# Altium PCB bbr18_motor_battery_board.PcbDoc
Units mm, origin at the board's own origin, x right, y up, seen from the top; angles counter-clockwise.
Board outline 57.41 x 45.19 mm, 2 copper layers (Top Layer, Bottom Layer), stack 1.571 mm thick; 46 components, 39 nets, 183 pads, 147 vias.
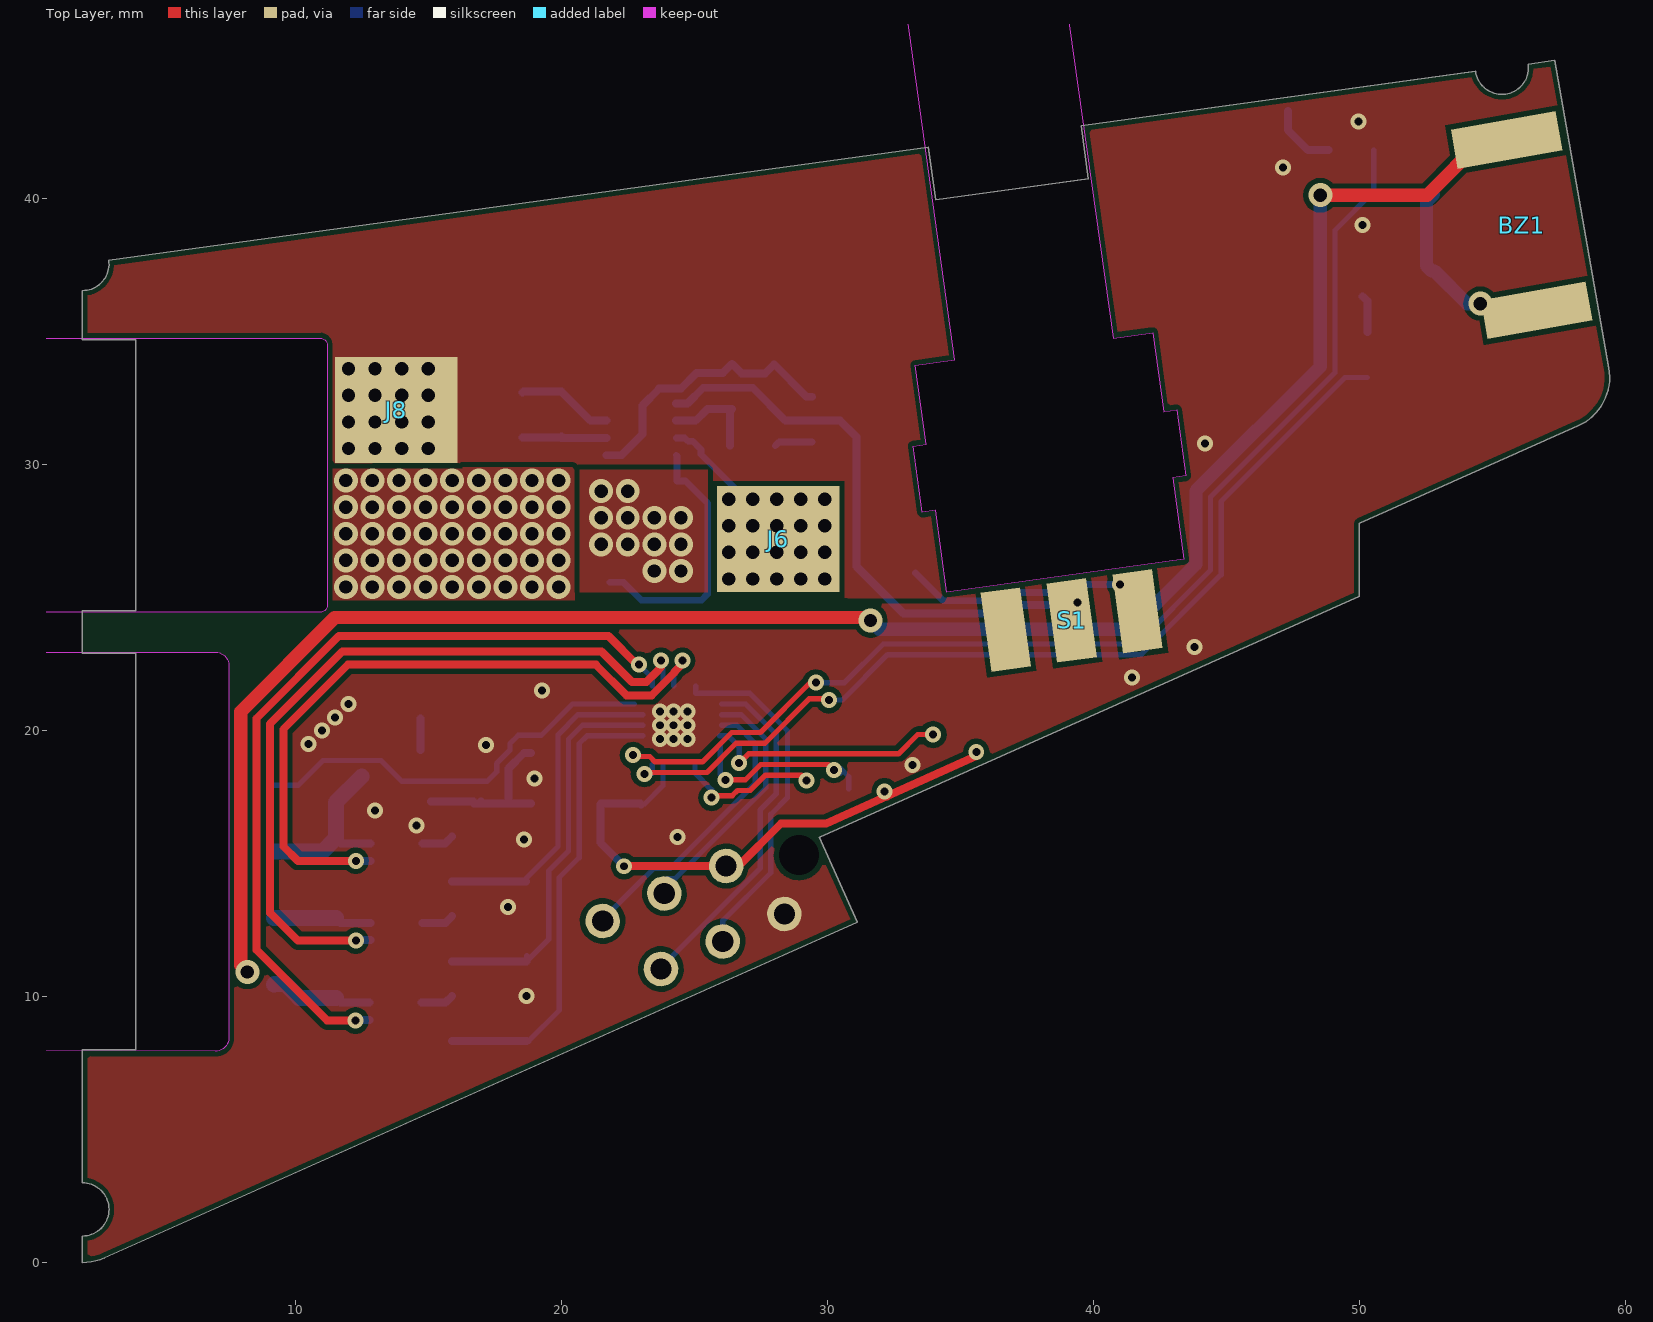
[diagram p0: Top Layer view]
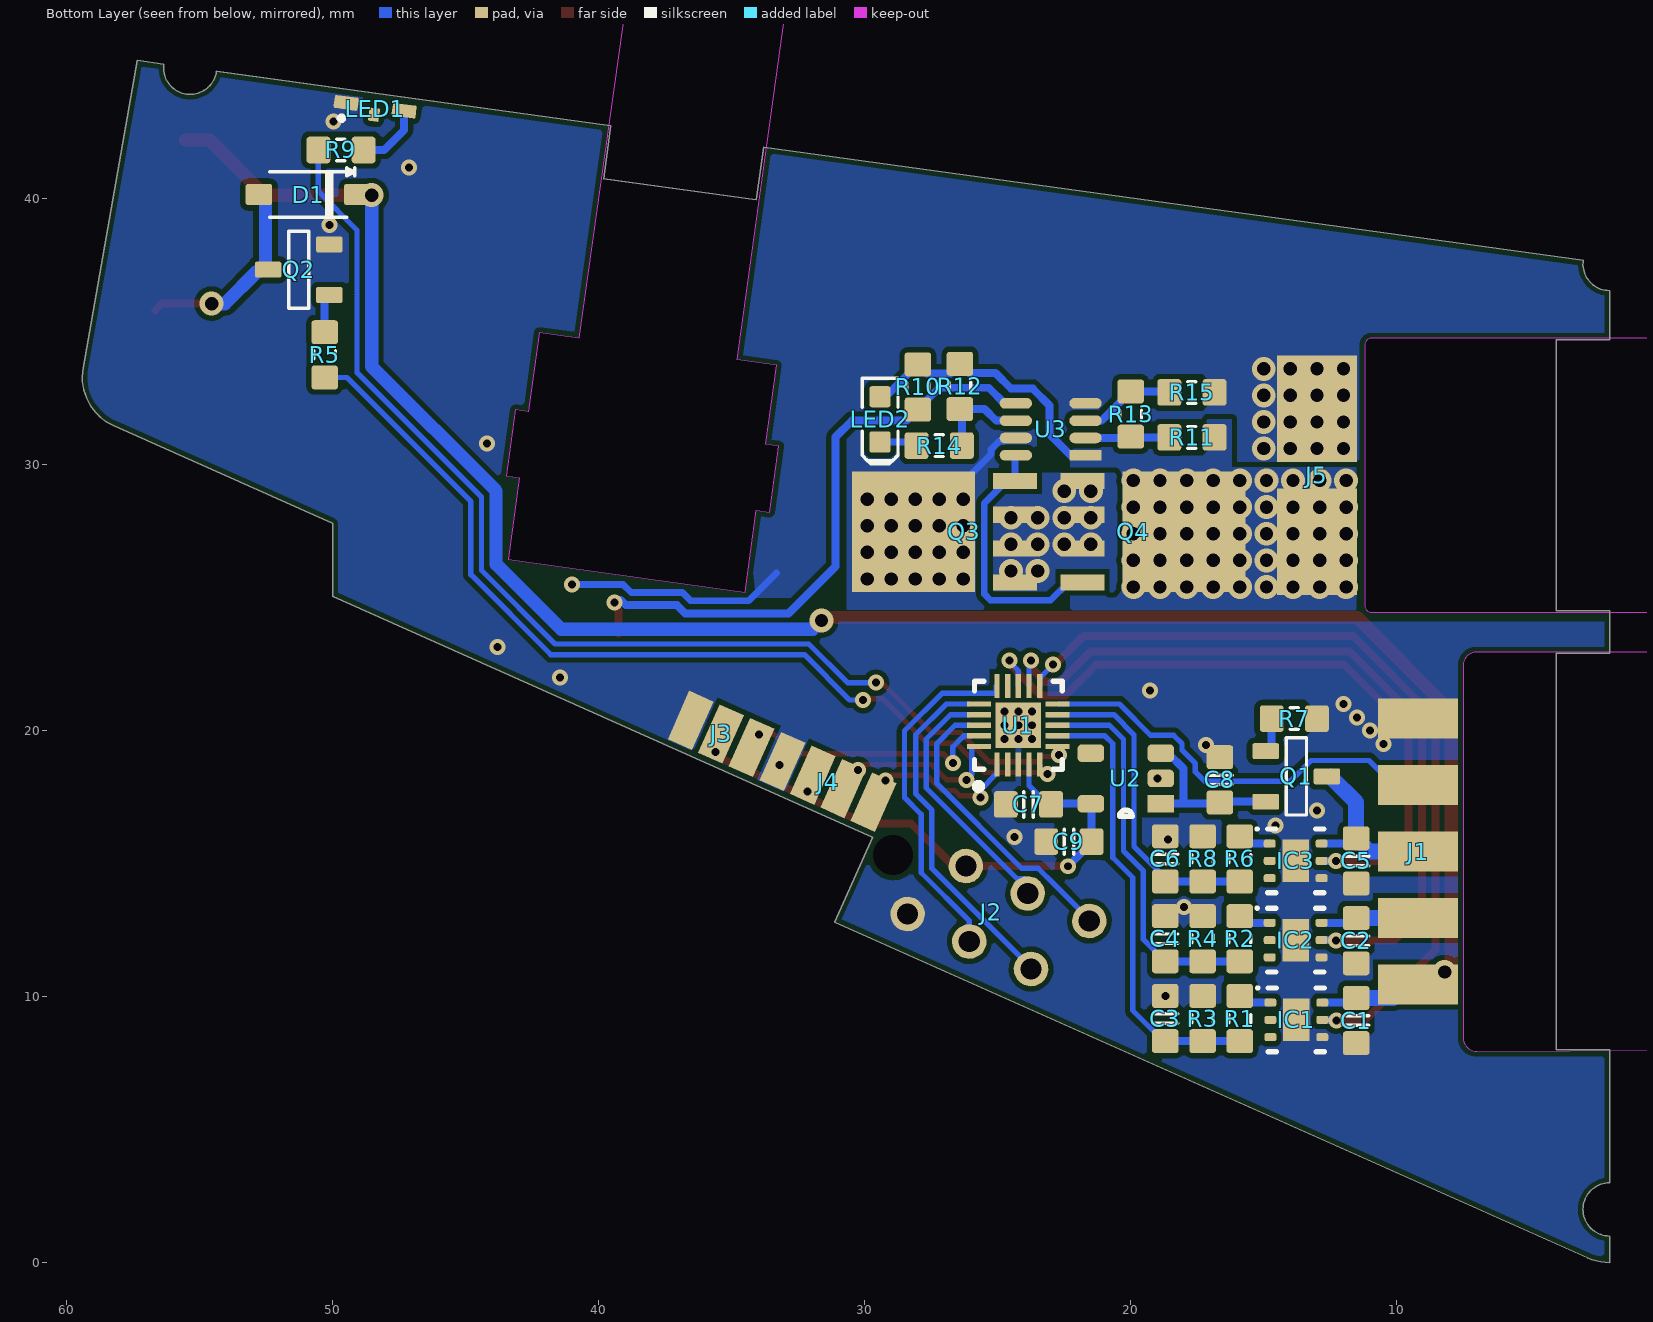
[diagram p1: Bottom Layer view, seen from below]
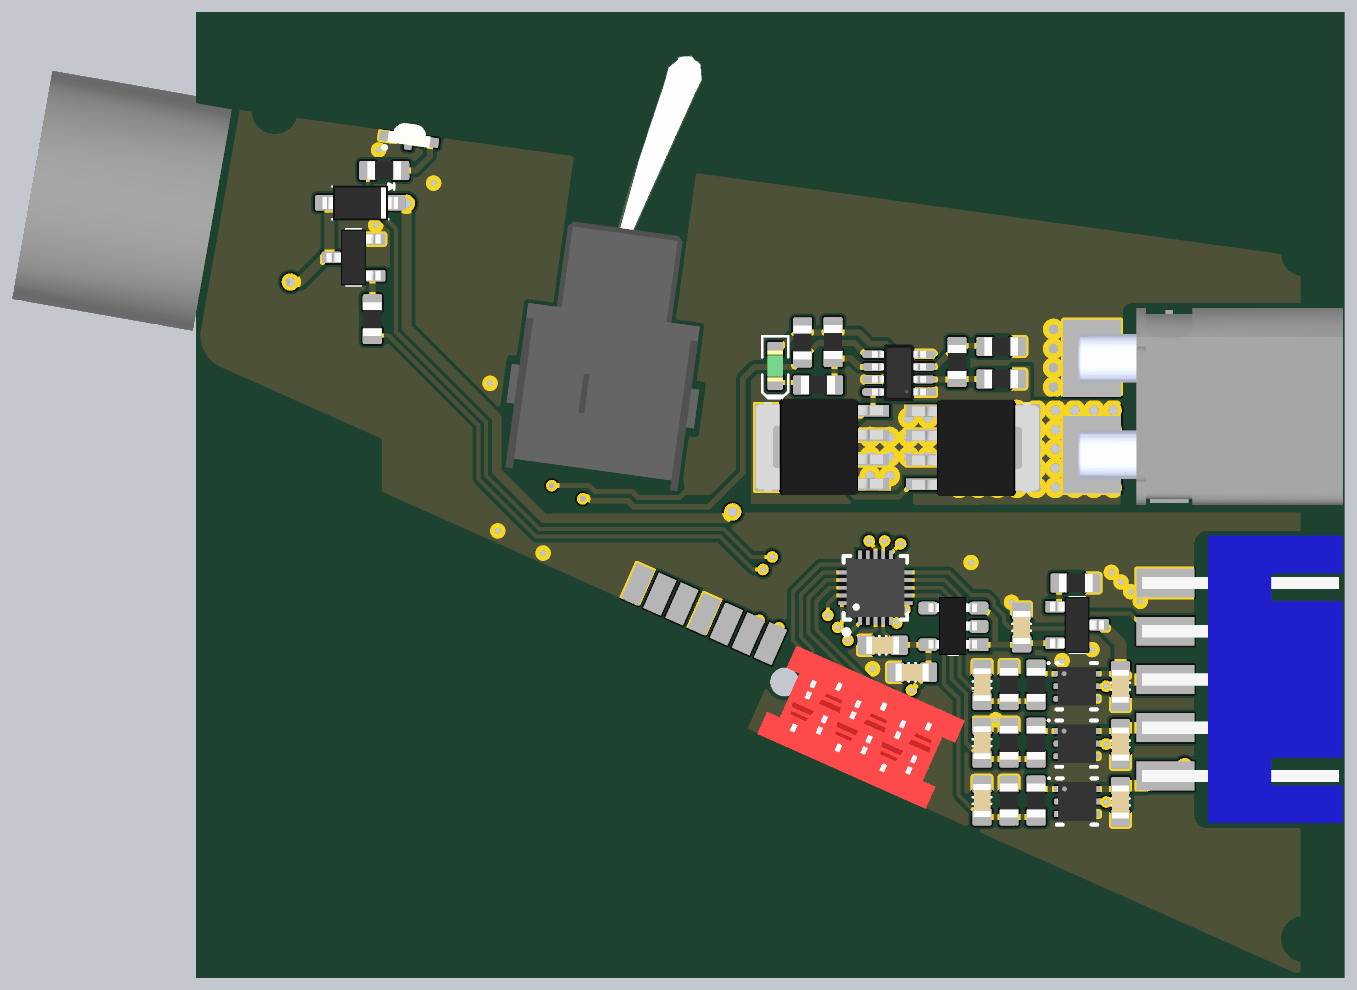
[diagram p2: 3D render of the assembled board from below, using the file's embedded part models]

## Layer stack, top to bottom
Top Solder: solder mask 0.0102, Solder Resist, Dk 3.5
Top Layer: signal copper 0.0356
Dielectric 1: dielectric 1.5, FR-4, Dk 4.8
Bottom Layer: signal copper 0.0356
Bottom Solder: solder mask 0.0102, Solder Resist, Dk 3.5

## Board outline
2,0 ccw(c2,2) 2.815,0.173 31.127,12.8 29.701,15.997 50,25.05 50,27.787 58.224,31.455 ccw(c57.41,33.282) 59.379,33.629 57.341,45.192 56.349,45.055 cw(c55.358,44.918) 54.367,44.781 54.368,44.781 39.543,42.731 39.817,40.75 34.071,39.955 33.797,41.936 2.991,37.677 cw(c2,37.54) 2,36.54 2,34.7 4,34.7 4,24.5 2,24.5 2,22.9 4,22.9 4,8 2,8 2,3 cw(c2,2) 2,1

## Design rules (kind name [scope] priority, off if disabled: settings)
BoardOutlineClearance [All] p1: gap=0.2 ignorepadtopadclearanceinfootprint=FALSE except(0: Arc-SplitContinuation Track-SplitContinuation SMDPad-SplitContinuation THPad-SplitContinuation Via-SplitContinuation Fill-SplitContinuation Poly-SplitContinuation Region-SplitContinuation Text-SplitContinuation)
Clearance ClearanceKeepOut [All vs OnLayer('Keep-Out Layer')] p1: gap=0.1 ignorepadtopadclearanceinfootprint=FALSE
Clearance [All] p2: gap=0.2 ignorepadtopadclearanceinfootprint=TRUE
ComponentClearance ComponentClearanceIgnore [HasFootprint('PADS-3-1020') or HasFootprint('PADS-4-1020')] p1: gap=0 collisioncheckmode=3 verticalgap=0 showdistances=FALSE
ComponentClearance NetTieClearance [HasFootprint('NET-TIE-0602')] p2: gap=0 collisioncheckmode=3 verticalgap=0 showdistances=FALSE
ComponentClearance [All] p3: gap=0.2 collisioncheckmode=3 verticalgap=0.2 showdistances=FALSE
DiffPairsRouting [All] p1: maxlimit=0.3 minlimit=0.2 mostfreqgap=0.2 toplayer_minwidth=0.2 toplayer_maxwidth=1 toplayer_prefwidth=0.3 bottomlayer_minwidth=0.2 bottomlayer_maxwidth=1 bottomlayer_prefwidth=0.3 maxuncoupledlength=12.7
HoleSize [All] p1: absolutevalues=TRUE maxlimit=5 minlimit=0.3 maxpercent=80.000 minpercent=20.000
HoleToHoleClearance [All] p1: gap=0.2 allowstackedmicrovias=TRUE
MinimumSolderMaskSliver [All] p1: minsoldermaskwidth=0.2
PolygonConnect [All] p1: connectstyle=Direct reliefconductorwidth=0.254 reliefentries=4 polygonreliefangle="90 Angle" airgapwidth=0.254
RoomDefinition power_protection [InComponentClass('power_protection')] p1: confinementstyle=ConfineIn formatcopy=TRUE lockcomponents=FALSE outline -14.8,-25.4 229.9,-25.4 229.9,65.9 -14.8,65.9
RoomDefinition lipo_alarm [InComponentClass('lipo_alarm')] p2: confinementstyle=ConfineIn formatcopy=TRUE lockcomponents=FALSE outline -23.4,-25.4 250.1,-25.4 250.1,61.2 -23.4,61.2
RoutingVias [All] p1: holewidth=0.3 width=0.6 viastyle="Through Hole" minholewidth=0.3 minwidth=0.6 maxholewidth=2 maxwidth=3
SolderMaskExpansion SolderMaskExpansionVia [IsVia And (Not IsTestpoint)] p1: expansion=-5
SolderMaskExpansion [All] p2: expansion=0.1
Width [All] p1: maxlimit=5 minlimit=0.2 preferedwidth=0.2 minimp=50.000000 maximp=50.000000 favimp=50.000000
25 further rules are at their usual default settings.

## Classes and differential pairs
component class power_protection: J5 J6 J8 LED2 Q3 Q4 R10 R11 R12 R13 R14 R15 S1 U3
component class lipo_alarm: BZ1 C1 C2 C3 C4 C5 C6 C7 C8 C9 D1 IC1 IC2 IC3 J1 J2 J3 J4 LED1 Q1 Q2 R1 R2 R3 R4 R5 R6 R7 R8 R9 U1 U2

## Components (designator, comment, footprint, x,y, rotation, side; value= is the part's Value field where it differs from the comment)
BZ1 "KGX1212" KXG1212 58,42.635 r10 top
C1 "1u" CAPC1608X90N 11.525,9.1 r270 bottom value=1µ
C2 "1u" CAPC1608X90N 11.525,12.1 r270 bottom value=1uF
C3 "100n" CAPC1608X90N 18.7,9.175 r90 bottom
C4 "100n" CAPC1608X90N 18.7,12.175 r90 bottom
C5 "1u" CAPC1608X90N 11.525,15.1 r270 bottom value=1µ
C6 "100n" CAPC1608X90N 18.7,15.175 r90 bottom
C7 "100n" CAPC1608X90N 23.845,17.225 r0 bottom
C8 "1u" CAPC1608X90N 16.65,18.15 r90 bottom
C9 "1u" CAPC1608X90N 22.325,15.825 r0 bottom
D1 "20V; 1A" SOD123 50.925,40.15 r0 bottom
IC1 "TPS22810DRVT" WSON-6 13.775,9.125 r180 bottom
IC2 "TPS22810DRVT" WSON-6 13.8,12.125 r180 bottom
IC3 "TPS22810DRVT" WSON-6 13.8,15.1 r180 bottom
J1 "BATTERY" JST-XH-5-TH-PCB-CUTOUT 7,10.45 r90 bottom
J2 "HEADER-6" MICRO-MATCH-FOB-06 28.389,13.104 r24 bottom
J3 "UPDI" PADS-3-1020 36.542,20.383 r204 bottom
J4 "UART" PADS-4-1020 33.092,18.833 r204 bottom
J5 "XT30U" XT30U-PCB-LA-CUTOUT 11.2,29.6 r180 bottom
J6 "V_OUT" POWER-PAD 28.152,27.2 r90 top
J8 "GND_OUT" POWER-PAD 13.8,32.05 r90 top
LED1 "Red" LED-0805S-SIDELED-2.1X0.6X1.0 48.4,43.449 r187.83 bottom
LED2 "Red" LED-0603-GREEN 29.424,31.699 r270 bottom
Q1 "BSS84" SOT23-3 13.775,18.275 r180 bottom
Q2 "NPM" SOT23-3 51.275,37.325 r0 bottom
Q3 "MOSFET-N" SOT669 27,27.475 r0 bottom
Q4 "MOSFET-N" SOT669 19.168,27.475 r180 bottom
R1 "3k" RESC1608X55N 15.9,9.175 r270 bottom value=20M
R2 "2k" RESC1608X55N 15.9,12.175 r270 bottom value=20M
R3 "1k" RESC1608X55N 17.3,9.175 r90 bottom value=20M
R4 "1k" RESC1608X55N 17.3,12.175 r90 bottom value=20M
R5 "1.5k?" RESC1608X55N 50.3,34.125 r90 bottom value=20M
R6 "1k" RESC1608X55N 15.9,15.175 r270 bottom value=20M
R7 "100k" RESC1608X55N 13.85,20.45 r0 bottom value=20M
R8 "1k" RESC1608X55N 17.3,15.175 r90 bottom value=20M
R9 "1k" RESC1608X55N 49.687,41.825 r180 bottom value=20M
R10 "100k" RESC1608X55N 28.003,32.917 r90 bottom value=1K5
R11 "7.5M" RESC1608X55N 17.7,31.023 r180 bottom value=1K5
R12 "10k" RESC1608X55N 26.421,32.938 r90 bottom value=1K5
R13 "105k" RESC1608X55N 20,31.9 r270 bottom value=1K5
R14 "10k" RESC1608X55N 27.2,30.711 r0 bottom value=1K5
R15 "196k" RESC1608X55N 17.7,32.711 r0 bottom value=1K5
S1 "SW-SPDT" A12AP-PCB-CUTOUT 38.95,25.825 r7.87 top locked
U1 "ATTINY416" QFN40P300X300X90_HS-21M 24.225,20.2 r90 bottom locked
U2 "LDO-SOT23-5" SOT23-5 18.87,17.25 r0 bottom
U3 "LTC4365" SOT23-8 21.7,30.35 r0 bottom

## Footprints (in the part's own frame and the unit in brackets; to place one, negate y for a bottom-side part, rotate by r counter-clockwise, add the part's x,y. Pads: shape width x height; smd on the part's side, far side on the other; paste and mask are expansions set on the pad)
A12AP-PCB-CUTOUT [mm] "A12AP-PCB-CUTOUT"
  rect 1.5x3 smd: 1(-2.5,-1.7) 2(0,-1.7) 3(2.5,-1.7)
  Keep-Out Layer board cut-out: -4.5,0 -4.5,3.1 -5,3.1 -5,5.6 -4.5,5.6 -4.5,8.6 -3,8.6 -3,24 2.969,24 3.001,8.6 4.5,8.6 4.5,5.6 5,5.6 5,3.1 4.5,3.1 4.5,0
  body extent -4.9,-3.1 4.9,21.79, height 2.3
CAPC1608X90N [mm] "Chip Capacitor, Body 1.6x0.8mm, EIA 0603, IPC Medium Density"
  round 0.254 on Mech15: 0(0,0)
  rrect25% 0.9x1 smd: 1(-0.85,0) 2(0.85,0)
  Top Layer pour cut-out: -0.6,0.5 -0.4,0.7 0.4,0.7 0.6,0.5 0.6,-0.5 0.4,-0.7 -0.4,-0.7 -0.6,-0.5
  silkscreen extent -0.18,-0.48 0.18,0.48, body extent -0.85,-0.45 0.85,0.45, height 0.89
JST-XH-5-TH-PCB-CUTOUT [mm]
  rect 1.5x3 smd: 1(0,2.2) 2(2.5,2.2) 3(5,2.2) 4(7.5,2.2) 5(10,2.2)
  Keep-Out Layer board cut-out: -2.473,-7 12.5,-7 12.5,0 12.462,0.191 12.354,0.354 12.191,0.462 12,0.5 12,0.5 -2.001,0.5 -2.194,0.461 -2.358,0.352 -2.467,0.187 -2.505,-0.006 -2.505,-0.006
  body extent -2.45,-7 12.45,3.4, height 2.71
KXG1212 [mm]
  rect 4x1.5 smd: 1(-2.5,0) 2(-2.5,-6.5)
  body extent -5.5,-9.25 9.5,2.75, height 6.3
LED-0603-GREEN [mm]
  round 0.254 on Mech15: 0(0,0)
  rrect25% 0.8x0.8 smd: A(-0.85,0) K(0.85,0)
  Top Layer pour cut-out: -0.5,0.5 0.5,0.5 0.5,-0.5 -0.5,-0.5
  silkscreen extent -1.55,-0.67 1.68,0.67, body extent -0.8,-0.4 0.8,0.4, height 0.75
LED-0805S-SIDELED-2.1X0.6X1.0 [mm] "Lite-On Inc PLCC Side LED"
  round 0.508 on Mech15: 0(0,0)
  rrect25% 0.9x0.5 smd: A(1.1,0) K(-1.1,0)
  rrect25% 0.4x0.5 smd: B(0,-0.3)
  Top Layer pour cut-out: -0.508,0.3 0.508,0.3 0.508,-0.3 -0.508,-0.3
  silkscreen extent -1.28,-0.68 -1.12,-0.52, body extent -1.1,-0.3 1.1,0.8, height 0.7
MICRO-MATCH-FOB-06 [mm]
  round 1.3 hole 0.8: 1(0,0) 2(-1.27,-2.54) 3(-2.54,0) 4(-3.81,-2.54) 5(-5.08,0) 6(-6.35,-2.54)
  round 0 hole 1.5 unplated: drill(1.4,-1.8)
  body extent -7.95,-3.77 1.6,1.23, height 4
PADS-3-1020 [mm]
  rect 1x2 smd: 1(0,0) 2(1.25,0) 3(2.5,0)
PADS-4-1020 [mm]
  rect 1x2 smd: 1(0,0) 2(1.25,0) 3(2.5,0) 4(3.75,0)
POWER-PAD [mm]
  rect 4x4.6 smd: 1(0,0)
QFN40P300X300X90_HS-21M [mm] "QFN, 20-Leads, Body 3,00x3,00mm, Pitch 0,40mm, Thermal Pad 1,70x1,70mm, IPC Low Density"
  rect 0.9x0.2 smd: 1(-1.475,0.8) 2(-1.475,0.4) 3(-1.475,0) 4(-1.475,-0.4) 5(-1.475,-0.8) 11(1.475,-0.8) 12(1.475,-0.4) 13(1.475,0) 14(1.475,0.4) 15(1.475,0.8)
  rect 0.2x0.9 smd: 6(-0.8,-1.475) 7(-0.4,-1.475) 8(0,-1.475) 9(0.4,-1.475) 10(0.8,-1.475) 16(0.8,1.475) 17(0.4,1.475) 18(0,1.475) 19(-0.4,1.475) 20(-0.8,1.475)
  rect 1.7x1.7 smd: 21(0,0)
  silkscreen extent -2.42,-1.65 1.65,1.65, body extent -1.5,-1.5 1.5,1.5, height 0.9
RESC1608X55N [mm] "Chip Resistor, Body 1.6x0.8mm, EIA 0603, IPC Medium Density"
  round 0.254 on Mech15: 0(0,0)
  rrect25% 0.9x1 smd: 1(-0.85,0) 2(0.85,0)
  Top Layer pour cut-out: -0.6,0.5 -0.4,0.7 0.4,0.7 0.6,0.5 0.6,-0.5 0.4,-0.7 -0.4,-0.7 -0.6,-0.5
  silkscreen extent -0.15,-0.41 0.15,0.41, body extent -0.87,-0.47 0.88,0.48, height 0.54
SOD123 [mm] "SOD-123; 2 Leads; Body 2.7 x 1.6 mm, (LxW)"
  round 0.508 on Mech15: 0(0,0)
  rrect25% 1x0.8 smd: A(1.85,0) K(-1.85,0)
  silkscreen extent -1.75,-1 1.45,0.85, body extent -1.95,-0.9 1.95,0.9, height 1.18
SOT23-3 [mm] "SOT23, 3 pin"
  round 0.5 on Mech15: 0(0,0)
  rrect25% 1x0.6 smd: 1(-1.15,0.95) 2(-1.15,-0.95) 3(1.15,0)
  silkscreen extent -0.38,-1.45 0.38,1.45, body extent -1.4,-1.45 1.4,1.45, height 1.29
SOT23-5 [mm]
  rect 1x0.66 smd: 1(0,0)
  rrect50% 1x0.66 smd: 2(0,-0.95) 3(0,-1.9) 4(2.63,-1.9) 5(2.63,0)
  silkscreen extent 1.08,0.24 1.55,0.48, body extent 0.1,-2.47 2.6,0.53, height 1.11
SOT23-8 [mm]
  rect 1.22x0.4 smd: 1(0,0)
  oval 1.22x0.4 smd: 2(0,-0.65) 3(0,-1.3) 4(0,-1.95) 5(2.62,-1.95) 6(2.62,-1.3) 7(2.62,-0.65) 8(2.62,0)
  body extent -0.09,-2.46 2.71,0.48, height 1.2
SOT669 [mil]
  rect 182x178 smd: D(46,0)
  rect 65x24 smd: G(-104.33,-75) S(-104.33,-25) S(-104.33,25) S(-104.33,75)
  body extent -125,-99 135,97, height 43
WSON-6 [mm] "SON, 6-Leads, Body 2,00x2,00mm, Pitch 0,65mm, Thermal Pad 1,60x1mm, IPC Medium Density"
  rrect50% 0.45x0.3 smd: 1(-0.975,0.65) 2(-0.975,0) 3(-0.975,-0.65) 4(0.975,-0.65) 5(0.975,0) 6(0.975,0.65)
  rect 1x1.6 smd: 7(0,0)
  silkscreen extent -1.5,-1.2 1.05,1.25, body extent -1.01,-1 1.01,1, height 0.8
XT30U-PCB-LA-CUTOUT [mm]
  rect 3x4 smd: 1(-1.8,2.5) 2(-1.8,-2.5)
  Keep-Out Layer board cut-out: 11.25,-5.15 11.25,5.15 0.25,5.15 0.125,5.116 0.034,5.025 0,4.9 0,4.9 0,-4.9 0.034,-5.025 0.125,-5.116 0.25,-5.15 0.25,-5.15
  body extent -2.5,-5.1 11.2,5.1, height 2.82

## Part data
BZ1: library part BUZZER
C1 C5: library part CAPC_1u_0603_X7R_16V_10%, "Capacitor SMD Cer 1uF 10% 16V X7R 0603", Manufacturer 1="TDK Corporation", Manufacturer Part Number 1=C1608X7R1C105K, Package / Case="0603 (1608 metric)", Ratings="16V; X7R", Supplier Part Number 1=445-1604-1-ND, Tolerance=±10%, ComponentLink1Description=http://product.tdk.com/capacitor/mlcc/en/documents/mlcc_commercial_general_en.pdf, ComponentLink1URL=http://product.tdk.com/capacitor/mlcc/en/documents/mlcc_commercial_general_en.pdf, Material=ceramic, SCDType=spec, Supplier 1=Digi-Key
C2: library part CAPC_100n_0603_X7R_50V_10%, "Capacitor SMD Cer 1uF 10% 50V X7R 0603", Manufacturer 1="AVX Corporation", Manufacturer 2="TDK Corporation", Manufacturer Part Number 1=06035C104KAT2A, Manufacturer Part Number 2=C1608X7R1H104K, Package / Case="0603 (1608 Metric)", Ratings="50V; X7R", Supplier Part Number 1=478-5052-1-ND, Tolerance=±10%, ComponentLink1Description=http://www.avx.com/docs/Catalogs/cx7r.pdf, ComponentLink1URL=http://www.avx.com/docs/Catalogs/cx7r.pdf, ComponentLink2Description=http://product.tdk.com/capacitor/mlcc/en/documents/mlcc_commercial_general_en.pdf, ComponentLink2URL=http://product.tdk.com/capacitor/mlcc/en/documents/mlcc_commercial_general_en.pdf, Material=ceramic, SCDType=spec, Supplier 1=Digi-Key, Supplier 2=Digi-Key, Supplier Part Number 2=445-1314-1-ND
C3 C4 C6 C7: library part CAPC_100n_0603_X7R_50V_10%, "Capacitor SMD Cer 100nF 10% 50V X7R 0603", Manufacturer 1="AVX Corporation", Manufacturer 2="TDK Corporation", Manufacturer Part Number 1=06035C104KAT2A, Manufacturer Part Number 2=C1608X7R1H104K, Package / Case="0603 (1608 Metric)", Ratings="50V; X7R", Supplier Part Number 1=478-5052-1-ND, Tolerance=±10%, ComponentLink1Description=http://www.avx.com/docs/Catalogs/cx7r.pdf, ComponentLink1URL=http://www.avx.com/docs/Catalogs/cx7r.pdf, ComponentLink2Description=http://product.tdk.com/capacitor/mlcc/en/documents/mlcc_commercial_general_en.pdf, ComponentLink2URL=http://product.tdk.com/capacitor/mlcc/en/documents/mlcc_commercial_general_en.pdf, Material=ceramic, SCDType=spec, Supplier 1=Digi-Key, Supplier 2=Digi-Key, Supplier Part Number 2=445-1314-1-ND
C8 C9: library part CAPC_2u2_0603_10V_10%, "Capacitor SMD Cer 2.2uF 10% 10V X5R 0603", Manufacturer 1="AVX Corporation", Manufacturer Part Number 1=0603ZD225KAT2A, Package / Case="0603 (1608 metric)", Ratings="10V; X5R", Supplier Part Number 1=478-6212-1-ND, Tolerance=±10%, ComponentLink1Description=http://www.avx.com/docs/Catalogs/cx5r.pdf, ComponentLink1URL=http://www.avx.com/docs/Catalogs/cx5r.pdf, Material=ceramic, SCDType=spec, Supplier 1=Digi-Key
D1: library part DIODE_SCHOTTKY_40V_1A, "Diode Schottky SMD 20V 1A SOD123", Manufacturer 1="Diodes Inc", Manufacturer Part Number 1=1N5819HW-7-F, Package / Case=SOD123, Ratings="40V; 1A", Supplier Part Number 1=1N5819HW-FDICT-ND, Diode Type=Schottky, Material=Si, Mounting Type="Surface Mount", SCDType=spec, Supplier 1=Digi-Key
IC1 IC2 IC3: "Power Load Switch, 18Vin, 3A, 0.079R, WSON-6, High Side,  TPS22810, TEXAS INSTRUMENTS", Input Voltage Range="2.7V .. 18V", Manufacturer="Texas Instruments", On-Resistance=0.079R, Operating Temperature Range="-40°C .. 105°C", Package=WSON-6, Supplier Part Number 1=2769481, ComponentLink1Description=Datasheet, ComponentLink1URL=http://www.ti.com/lit/ds/symlink/tps22810.pdf, Manufacturer Part Number=TPS22810DRVT, Number of Channels=1, Supplier 1=Farnell, Supplier 2=Mouser, Supplier Part Number 2=595-TPS22810DRVT
J1: library part HEADER-5
J3: library part HEADER-3
J4: library part HEADER-4
J6 J8: library part HEADER-1
LED1: library part LED_SMD_RED_0805RA_250mcd, "LED SMD SIDELED Red 630nm 250mcd 0805", Manufacturer 1="Kingbright Corp", Manufacturer Part Number 1=APA2106SURCK, Package / Case="2.1x0.6x1.0mm SIDELED", Ratings="250 mcd; 630 nm", Supplier Part Number 1=754-1060-1-ND, Color=Red, Material=Al-InGaN, SCDType=spec, Supplier 1=Digi-Key
LED2: library part LED_SMD_Green_0603_525nm_350mcd, "LED 0603 SMD Green 525nm 350mcd 20mA", Color=Green, Current - Test=20mA, Manufacturer 1=Kingbright, Manufacturer 2="Kingbright Company LLC", Manufacturer Part Number 1=APT1608ZGCK, Manufacturer Part Number 2=APT1608-WAP24, Package / Case="0603 (1608 metric)", Ratings="200mcd min; 350 mcd typ @ 20mA", Supplier Part Number 1=604-APT1608ZGCK, Voltage - Forward (Vf) @ 10mA=3.1V, Voltage - Forward (Vf) @ 20mA=3.3V, ComponentLink1Description=http://www.mouser.com/ds/2/216/APT1608ZGCK-262051.pdf, ComponentLink1URL=http://www.mouser.com/ds/2/216/APT1608ZGCK-262051.pdf, ComponentLink2Description="APT1608-WAP24 Datasheet", ComponentLink2URL="\\SVFI2\PBLShare\Eng\Electrical Engineering\Hardware\Altium\Libraries and Templates\Unreleased Components\Part Number Request 2013-10-02\APT1608-WAP24(Ver.1B).pdf", Lens Style/Size="Rectangle with Flat Top, 1.2mm x 0.8mm", Material=InGaN, SCDType=source, Supplier 1=Mouser, Viewing Angle=120°
Q1: library part MOSFET_BSS84, "MOSFET SMD P-CH 50V 130mA SOT23-3", Current - Continuous Drain (Id) @ 25° C=130mA, Drain to Source Voltage (Vdss)=50V, Input Capacitance (Ciss) @ Vds="73pF @ 25V", Manufacturer 1="Fairchild Semiconductor", Package / Case=SOT23-3, Power - Max=360mW, Ratings="50V; 130mA", Supplier Device Package=SOT-23, Supplier Part Number 1=BSS84CT-ND, ComponentLink1Description=http://www.fairchildsemi.com/ds/BS/BSS84.pdf, ComponentLink1URL=http://www.fairchildsemi.com/ds/BS/BSS84.pdf, FET Feature="Logic Level Gate", FET Type="MOSFET P-Channel, Metal Oxide", Gate Charge (Qg) @ Vgs="1.3nC @ 5V", Manufacturer Part Number 1=BSS84, Material="Metal Oxide", Rds On (Max) @ Id, Vgs="10 Ohm @ 100mA, 5V", SCDType=undef, Supplier 1=Digi-Key, Vgs(th) (Max) @ Id="2V @ 1mA"
Q2: library part NPN_FMMT617TA, "Transistor SMD NPN 15V 3A SOT-23", Manufacturer 1=Diodes/Zetex, Manufacturer Part Number 1=FMMT617TA, Package / Case=SOT-23, Ratings="15V; 3A; 625mW", Supplier Part Number 1=FMMT617CT-ND, SCDType=spec, Supplier 1=Digi-Key
R1 R2 R3 R4 R5 R6 R7 R8 R9: library part RES_1K_0603_5%, "Resistor SMD chip 1k Ohm 0.1W 5% 0603", Manufacturer 1=Yageo, Manufacturer 2="Vishay Dale", Manufacturer Part Number 1=RC0603JR-071KL, Manufacturer Part Number 2=CRCW06031K00JNEA, Package / Case="0603 (1608 metric)", Ratings="1/10 W", Supplier Part Number 1=311-1.0KGRCT-ND, Tolerance=±5%, ComponentLink1Description=http://www.yageo.com/documents/recent/PYu-RC0603_51_RoHS_L_4.pdf, ComponentLink1URL=http://www.yageo.com/documents/recent/PYu-RC0603_51_RoHS_L_4.pdf, ComponentLink2Description=http://www.vishay.com/doc?20008, ComponentLink2URL=http://www.vishay.com/doc?20008, Material="Thick Film", SCDType=spec, Supplier 1=Digi-Key, Supplier 2=Digi-Key, Supplier Part Number 2=541-1.0KGCT-ND
R10 R11 R12 R13 R14 R15: library part RES_1K5_0603_5%, "Resistor SMD chip 1.5k Ohm 0.1W 5% 0603", Manufacturer 1=Yageo, Manufacturer Part Number 1=RC0603JR-071K5L, Package / Case="0603 (1608 metric)", Ratings="1/10 W", Supplier Part Number 1=311-1.5KGRCT-ND, Tolerance=±5%, Material="thick film", SCDType=spec, Supplier 1=Digi-Key
Q3 Q4: PROD_ID=IC-08089

## Via types
v1: diameter 0.9, hole 0.5, Top Layer to Bottom Layer, 97 vias
v2: diameter 0.6, hole 0.3, Top Layer to Bottom Layer, 50 vias

## Nets (pads, with @x,y where several pads share a name; then routed paths per layer and width w, separated by ;. In a path a pad name is that pad's centre, name@x,y a point inside that pad or via, vN(x,y) a via of type N, cw(c..) or ccw(c..) an arc to the next point about the centre after c; other vN are vias at no path point)
5V: C7.1 C9.1 J2.2 J3.2 J4.2 U1.4 U2.5 | length 20.5
  Top Layer w0.3: v2(22.36,14.9) 22.368,14.908 J2.2 26.66,14.908 28.252,16.5 29.95,16.5 32.236,17.527 v2@35.625,19.05
  Bottom Layer w0.2: C7.1@23.145,17.25 23.825,17.93 U1.4
  Bottom Layer w0.3: v2(22.36,14.9) 21.475,15.785 C9.1 21.475,17.225 U2.5 22.97,17.25 C7.1
  other v2: 32.153,17.711 35.6,19.2
ADC2: C6.1 R6.2 R8.1 U1.9 | length 12.3
  Bottom Layer w0.2: C6.1 18.675,14.325 18.675,14.441 19.875,15.641 19.875,19.839 20.636,20.6 U1.9 U1.9@23.075,20.6
  Bottom Layer w0.3: R6.2 C6.1@18.675,14.325
ADC3: C4.1 R2.2 R4.1 U1.8 | length 15
  Bottom Layer w0.2: C4.1@18.7,11.546 C4.1 19.525,12.15 19.525,14.725 20.275,15.475 20.275,19.673 20.802,20.2 U1.8 U1.8@23.075,20.2
  Bottom Layer w0.3: R2.2 C4.1
ADC4: C3.1 R1.2 R3.1 U1.7 | length 17.4
  Bottom Layer w0.2: C3.1 18.775,8.325 19.925,9.475 19.925,14.475 20.675,15.225 20.675,19.508 20.967,19.8 U1.7 U1.7@23.075,19.8
  Bottom Layer w0.3: R1.2 R3.1 C3.1
BAT+: J5.2 LED2.A Q4.D R10.2 R11.2 R12.2 U3.1 | length 10.6
  Bottom Layer w0.3: U3.1 22.264,30.35 23.054,31.141 23.054,32.222 23.682,32.85 24.494,32.85 25.082,33.437 26.071,33.437 R12.2 26.779,33.43 27.665,33.43 R10.2 29.221,32.549 LED2.A
  other v1: 11.9,25.4 12.9,25.4 13.9,25.4 14.9,25.4 15.9,25.4 16.9,25.4 17.9,25.4 18.9,25.4 19.9,25.4 11.9,26.4 12.9,26.4 13.9,26.4 14.9,26.4 15.9,26.4 16.9,26.4 17.9,26.4 18.9,26.4 19.9,26.4 11.9,27.4 12.9,27.4 13.9,27.4 14.9,27.4 15.9,27.4 16.9,27.4 17.9,27.4 18.9,27.4 19.9,27.4 11.9,28.4 12.9,28.4 13.9,28.4 14.9,28.4 15.9,28.4 16.9,28.4 17.9,28.4 18.9,28.4 19.9,28.4 11.9,29.4 12.9,29.4 13.9,29.4 14.9,29.4 15.9,29.4 16.9,29.4 17.9,29.4 18.9,29.4 19.9,29.4
BZ_PWM: R5.1 U1.5 | length 35.6
  Top Layer w0.2: v2@23.225,18.425 25.475,18.425 26.575,19.525 27.651,19.525 29.326,21.2 30.006,21.2 v2(30.056,21.15)
  Bottom Layer w0.2: v2@23.05,18.4 23.425,18.4 U1.5 ; v2(30.056,21.15) 30.566,21.15 32.271,22.855 41.801,22.855 44.808,25.861 44.808,28.614 49.468,33.275 R5.1
  other v2: 23.125,18.375
EN_S2: IC3.5 U1.13 | length 26.4
  Top Layer w0.3: v2(12.276,15.101) 10.099,15.101 9.55,15.65 9.55,20.047 11.978,22.475 21.3,22.475 22.45,21.325 23.401,21.325 24.251,22.175 24.251,22.207 24.67,22.626 v2(24.551,22.626)
  Bottom Layer w0.2: U1.13 24.225,21.947 24.225,22.249 24.525,22.549 24.525,22.56 24.591,22.626 v2(24.551,22.626)
  Bottom Layer w0.3: v2@12.225,15.1 IC3.5 ; v2@12.226,15.101 v2(12.276,15.101)
EN_S3: IC2.5 U1.12 | length 29.1
  Top Layer w0.3: v2(12.276,12.101) 10.099,12.101 9.05,13.15 9.05,20.254 11.771,22.975 19.307,22.975 21.507,22.975 22.657,21.825 23.194,21.825 23.195,21.826 23.576,22.207 23.751,22.382 v2(23.751,22.626)
  Bottom Layer w0.2: v2(23.751,22.626) 23.825,22.552 U1.12
  Bottom Layer w0.3: v2@12.275,12.125 IC2.5 ; v2(12.276,12.101) v2@12.276,12.124
EN_S4: IC1.5 U1.11 | length 31.2
  Top Layer w0.3: v2(12.266,9.1) 11.2,9.1 8.55,11.75 8.55,20.462 11.638,23.55 21.775,23.55 22.85,22.475 22.851,22.476 v2(22.926,22.476)
  Bottom Layer w0.2: v2(22.926,22.476) 22.926,22.474 23.375,22.025 23.425,22.025 U1.11
  Bottom Layer w0.3: v2(12.266,9.1) 12.266,9.109 12.25,9.125 IC1.5
GATE: Q3.G Q4.G U3.8 | length 10
  Bottom Layer w0.25: Q4.G 22.341,25.57 23.011,24.9 25.27,24.9 25.501,25.131 25.501,28.549 24.67,29.38 Q3.G 24.35,30.32 U3.8
GND: C1.2 C2.2 C3.2 C4.2 C5.2 C6.2 C7.2 C8.2 C9.2 IC1.4 IC1.7 IC2.4 IC2.7 IC3.4 IC3.7 J1.5 J2.1 J3.1 J4.1 LED1.K Q2.2 R3.2 R4.2 R7.1 R8.2 U1.3 U1.21 U2.2
  other v2: 18.7,10.025 18,13.362 18.6,15.9 24.375,16 14.55,16.425 13,17 19,18.2 33.2,18.7 17.175,19.45 10.5,19.5 23.719,19.692 24.225,19.689 24.744,19.689 11,20 23.708,20.2 24.225,20.2 24.744,20.2 11.5,20.5 23.708,20.714 24.225,20.714 24.75,20.725 12,21 19.275,21.512 41.45,22 43.8,23.15 44.2,30.8 50.125,39 47.125,41.175 49.975,42.889
LED_PWM: R9.1 U1.6 | length 42.9
  Top Layer w0.2: v2@22.95,19.025 23.325,19.025 23.525,18.825 25.309,18.825 26.409,19.925 27.486,19.925 29.361,21.8 v2(29.575,21.8)
  Bottom Layer w0.2: v2(29.575,21.8) 30.65,21.8 32.105,23.255 41.635,23.255 44.408,26.027 44.408,28.78 49.083,33.455 49.083,38.807 50.537,40.261 R9.1
  other v2: 22.7,19.075
MISO: J2.5 U1.16 | length 13.4
  Bottom Layer w0.2: J2.5@23.387,11.145 23.799,11.145 27.475,14.821 27.475,17.016 28.087,17.628 28.087,19.845 26.932,21 U1.16@26.025,21
MOSI: J2.4 U1.17 | length 9.7
  Bottom Layer w0.2: J2.4@23.514,13.982 23.958,14.425 24.266,14.425 27.687,17.847 27.687,19.679 26.766,20.6 U1.17@26.025,20.6
NetBZ1_2: BZ1.2 D1.A Q2.3 | length 7.6
  Top Layer w0.3: v1(54.55,36.05) 56.416,36.05 BZ1.2
  Bottom Layer w0.5: D1.A 52.525,39.9 52.525,37.475 52.725,37.275 52.825,37.275 54.05,36.05 v1(54.55,36.05)
NetIC1_1: IC1.1 R1.1 | length 1.3
  Bottom Layer w0.3: IC1.1 15.65,9.775 R1.1
NetIC2_1: IC2.1 R2.1 | length 1.2
  Bottom Layer w0.3: IC2.1 15.65,12.775 R2.1
NetIC3_1: IC3.1 R6.1 | length 1.2
  Bottom Layer w0.3: IC3.1 15.625,15.75 R6.1
NetLED1_A: LED1.A R9.2 | length 2.6
  Bottom Layer w0.3: LED1.A 47.31,42.577 48.062,41.825 R9.2
NetLED2_K: LED2.K R14.2 | length 1.4
  Bottom Layer w0.25: R14.2 28.188,30.849 LED2.K
NetQ1_1: Q1.1 R7.2 | length 1.2
  Bottom Layer w0.3: Q1.1@14.7,19.275 R7.2
NetQ2_1: Q2.1 R5.2 | length 1.4
  Bottom Layer w0.3: Q2.1@50.125,36.325 50.3,36.15 R5.2
NetQ3_S: Q3.S Q4.S
  other v1: 23.5,26 24.5,26 21.5,27 22.5,27 23.5,27 24.5,27 21.5,28 22.5,28 23.5,28 24.5,28 21.5,29 22.5,29
nFAULT: R12.1 R14.1 U3.6 | length 3.7
  Bottom Layer w0.3: U3.6 25.054,31.65 25.492,32.088 R12.1 26.35,32.017 R14.1
OV: R13.1 R15.2 U3.3 | length 3.6
  Bottom Layer w0.3: R15.2 18.589,32.75 R13.1 21.1,31.65 U3.3
PGND: J5.1 J8.1 R15.1 S1.3 U3.4 | length 8.4
  Bottom Layer w0.254: 33.315,25.924 34.357,24.882 36.549,24.882 36.857,25.19 38.777,25.19 39.08,25.493 v2(41,25.493)
  other v1: 12,30.6 13,30.6 14,30.6 15,30.6 12,31.6 13,31.6 14,31.6 15,31.6 12,32.6 13,32.6 14,32.6 15,32.6 12,33.6 13,33.6 14,33.6 15,33.6
RX: J4.4 U1.1 | length 5.5
  Top Layer w0.2: v2(25.651,17.476) 25.725,17.55 26.424,17.55 26.624,17.75 27.1,17.75 27.675,18.325 29.027,18.325 v2(29.226,18.126)
  Bottom Layer w0.2: U1.1 25.025,18.4 25.651,17.774 v2(25.651,17.476) ; v2(29.226,18.126) v2(29.226,18.126)
S1: J1.4 U1.10 | length 15.8
  Bottom Layer w0.2: J1.4 10.125,17.95 11.05,18.875 13.224,18.875 13.999,18.1 17.225,18.1 17.57,18.445 17.57,18.765 18.07,19.265 18.07,19.508 18.387,19.825 19.25,19.825 20.425,21 U1.10
S2: C5.1 IC3.6 J1.3 Q1.3 | length 6.6
  Bottom Layer w0.3: C5.1 11.725,15.75 C5.1@12.006,15.75 ; C5.1@12.006,15.751 IC3.6
  Bottom Layer w0.6: J1.3 11.025,15.45 C5.1 11.525,17.3 Q1.3@12.5,18.275
S2_OUT: C8.1 Q1.2 U2.1 U2.3 | length 6.2
  Bottom Layer w0.3: Q1.2@15.1,17.325 C8.1@16.7,17.325 ; C8.1@16.725,17.25 18,17.25 ; C8.1@16.975,17.325 C8.1@17,17.3 ; U2.1 18,17.25 ; U2.3 18.592,19.15 18.02,18.578 18.02,17.27 18,17.25
S3: C2.1 IC2.6 J1.2 | length 3.5
  Bottom Layer w0.3: C2.1@11.7,12.775 IC2.6
  Bottom Layer w0.6: J1.2 C2.1
S4: BZ1.1 C1.1 D1.K IC1.6 J1.1 | length 76
  Top Layer w0.5: v1(8.2,10.925) 7.95,11.175 7.95,20.71 11.49,24.25 31.51,24.25 v1(31.625,24.135) ; v1(48.533,40.125) 52.55,40.125 54.626,42.201 BZ1.1
  Bottom Layer w0.3: C1.1 11.7,9.775 IC1.6
  Bottom Layer w0.5: v1(31.625,24.135) 31.955,23.805 41.408,23.805 43.858,26.255 43.858,29.008 48.533,33.683 v1(48.533,40.125)
  Bottom Layer w0.6: J1.1 9.225,10.475 9.625,10.475 10.15,9.95 C1.1
SCK: J2.3 U1.15 | length 13.2
  Bottom Layer w0.2: U1.15@25.05,21.675 25.05,21.4 27.098,21.4 28.503,19.995 28.503,17.478 27.875,16.85 27.875,14.656 26.068,12.849 J2.3
SHDN: R10.1 S1.2 U3.5 | length 22.7
  Top Layer w0.3: S1.2@39.251,23.646 S1.2@39.251,24.532
  Bottom Layer w0.3: U3.5 24.75,32.3 25.338,32.888 27.195,32.888 28.432,31.65 30.482,31.65 31.1,31.032 31.1,26.17 32.865,24.405 36.746,24.405 37.054,24.713 38.975,24.713 39.174,24.912 v2@39.3,24.912
  other v2: 39.4,24.812
SSEL: J2.6 U1.18 | length 11.2
  Bottom Layer w0.2: J2.6@21.194,12.949 21.599,12.949 23.114,14.464 23.121,14.464 23.481,14.825 24.1,14.825 27.287,18.013 27.287,19.513 26.601,20.2 U1.18@26.025,20.2
TX: J4.3 U1.20 | length 6.8
  Top Layer w0.2: v2(26.175,18.15) 26.925,18.15 27.5,18.725 27.983,18.725 ; 27.984,18.726 30.046,18.726 v2(30.25,18.522)
  Bottom Layer w0.2: U1.20@25.975,19.4 25.975,18.35 v2(26.175,18.15) ; J4.3@30.5,18.397 30.5,18.573 30.808,18.265 J4.3
UPDI: J3.3 U1.19 | length 9.3
  Top Layer w0.2: v2(26.688,18.775) 27.038,19.125 27.817,19.125 ; 27.818,19.126 32.676,19.126 33.401,19.851 v2(33.977,19.851)
  Bottom Layer w0.2: U1.19@25.95,19.8 26.274,19.8 26.45,19.624 26.588,19.486 26.688,19.387 v2(26.688,18.775)
UV: R11.1 R13.2 U3.2 | length 3.2
  Bottom Layer w0.3: R11.1 R13.2@19.973,31.023 ; R13.2 R13.2@19.973,31.023 ; U3.2 19.995,31 R13.2@19.973,31.023
VOUT: J6.1 Q3.D U3.7 | length 5.4
  Bottom Layer w0.25: U3.7 24.643,31 24.768,30.875 24.947,30.875 25.255,30.567 25.255,30.388 Q3.D
  other v1: 26.3,25.7 27.2,25.7 28.1,25.7 29,25.7 29.9,25.7 26.3,26.7 27.2,26.7 28.1,26.7 29,26.7 29.9,26.7 26.3,27.7 27.2,27.7 28.1,27.7 29,27.7 29.9,27.7 26.3,28.7 27.2,28.7 28.1,28.7 29,28.7 29.9,28.7
pads on no net: C1.0 C2.0 C3.0 C4.0 C5.0 C6.0 C7.0 C8.0 C9.0 D1.0 IC1.2 IC1.3 IC2.2 IC2.3 IC3.2 IC3.3 J2.drill LED1.0 LED1.B LED2.0 Q1.0 Q2.0 R1.0 R2.0 R3.0 R4.0 R5.0 R6.0 R7.0 R8.0 R9.0 R10.0 R11.0 R12.0 R13.0 R14.0 R15.0 S1.1 U1.2 U1.14 U2.4

## Polygon pours and split planes (outlines as drawn)
GND on Top Layer "Top Layer-GND" (solid, remove dead copper, pour order 8): 0.325,-1.025 1.011,37.689 58.224,45.314 60.725,26
PGND on Top Layer "Top Layer-PGND" (solid, remove dead copper, pour order 7): 1.054,24.975 35.175,24.975 36,42.731 1.054,37.863
NetQ3_S on Top Layer "Top Layer-NetQ3_S" (solid, remove dead copper, pour order 0): 20.7,25.2 25.5,25.2 25.5,29.8 20.7,29.8
BAT+ on Top Layer "Top Layer-BAT+" (solid, remove dead copper, pour order 1): 11.2,24.9 20.5,24.9 20.5,29.9 11.2,29.9
GND on Bottom Layer "Bottom Layer-GND" (solid, remove dead copper, pour order 6): 1.258,-1.383 63.177,26.502 58.499,46.351 39.137,43.137 34.071,24.1 0.325,24.1
PGND on Bottom Layer "Bottom Layer-PGND" (solid, remove dead copper, pour order 5): 2,25 34.084,25 36,42.731 2,37.677
BAT+ on Bottom Layer "Bottom Layer-BAT+" (solid, remove dead copper, pour order 4): 11.469,24.516 11.525,24.572 11.525,29.9 16.2,29.9 16.2,31.7 22.273,31.729 22.273,24.5
VOUT on Bottom Layer "Bottom Layer-VOUT" (solid, remove dead copper, pour order 3): 30.68,24.539 30.68,32.259 30.663,32.242 23.525,32.242 23.525,24.632 23.425,24.532
NetQ3_S on Bottom Layer "Bottom Layer-NetQ3_S" (solid, remove dead copper, pour order 2): 20.511,25.2 20.511,29.7 25.719,29.7 25.719,25.2

## Silkscreen, mask and mechanical layers (free items; w line width, h text height)
Mechanical 1:
  the board outline again, w0.1